# Altium PCB USB-C-SMD_C49261591.pcbdoc
Units mm, origin at the board's own origin, x right, y up, seen from the top; angles counter-clockwise.
Board outline 25.7 x 21.03 mm, 2 copper layers (Top Layer, Bottom Layer); 1 components, 0 nets, 30 pads, 0 vias.
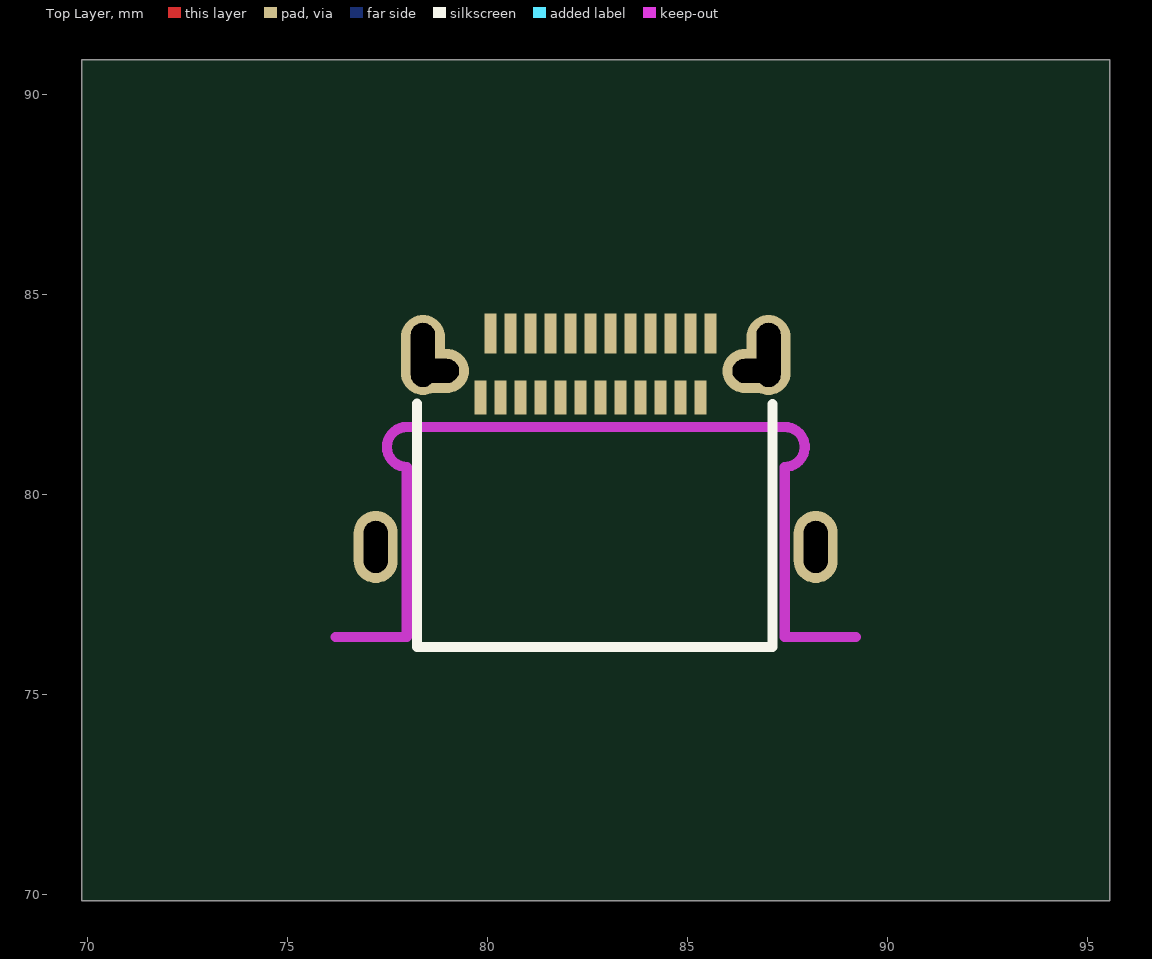
[diagram p0: Top Layer view]
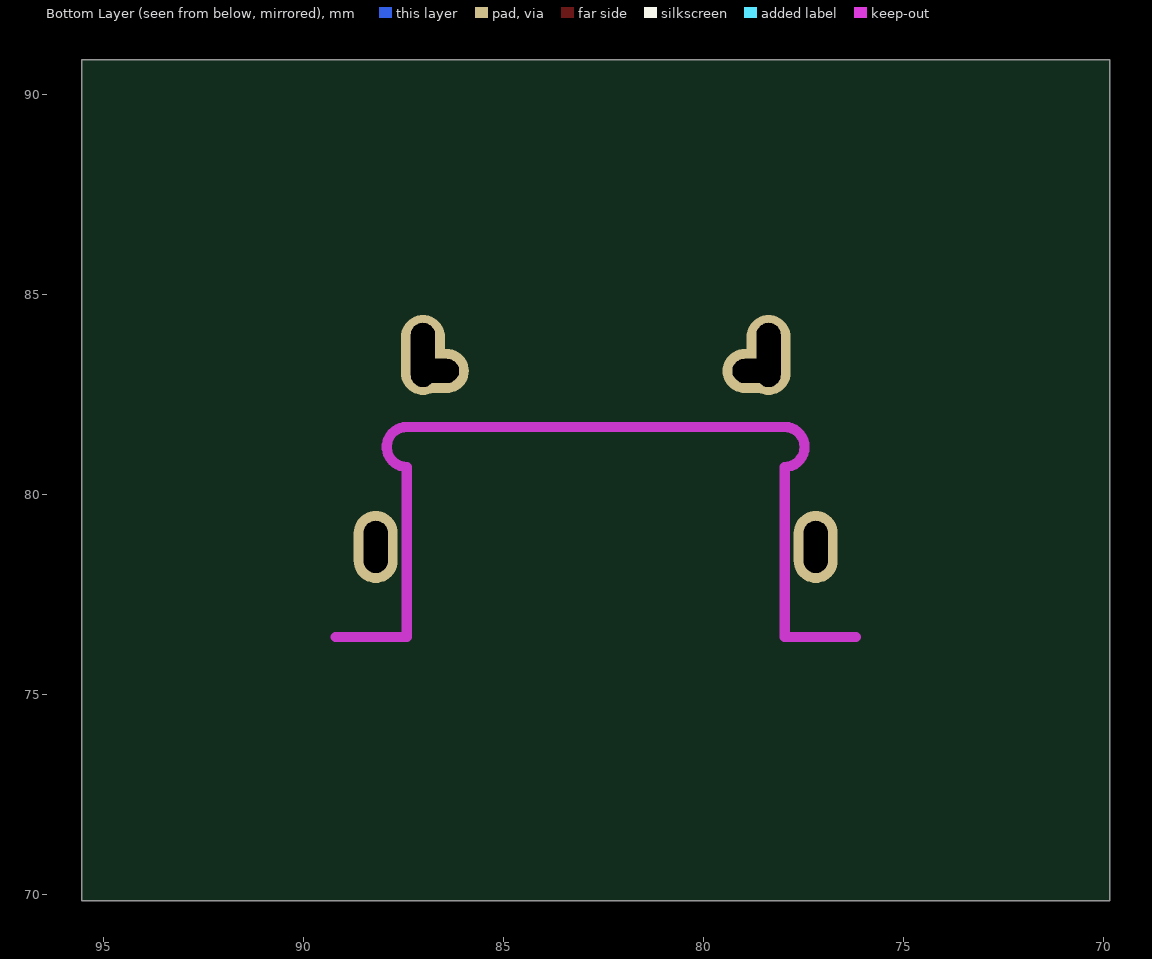
[diagram p1: Bottom Layer view, seen from below]

## Layer stack, top to bottom
Top Layer: signal copper (thickness not stored)
Dielectric: dielectric 0.32, FR-4, Dk 4.8
Bottom Layer: signal copper (thickness not stored)

## Board outline
95.55,69.85 69.85,69.85 69.85,90.88 95.55,90.88

## Design rules (kind name [scope] priority, off if disabled: settings)
BoardOutlineClearance safeClearance [All] p0: genericclearance=0.254 ignorepadtopadclearanceinfootprint=FALSE except(0: Arc-SplitContinuation Track-SplitContinuation SMDPad-SplitContinuation THPad-SplitContinuation Via-SplitContinuation Fill-SplitContinuation Poly-SplitContinuation Region-SplitContinuation Text-SplitContinuation; 0.152: Track-CutoutEdge SMDPad-CutoutEdge THPad-CutoutEdge Via-CutoutEdge Fill-CutoutEdge Region-CutoutEdge; 0.3: Track-OutlineEdge SMDPad-OutlineEdge THPad-OutlineEdge Via-OutlineEdge Fill-OutlineEdge Region-OutlineEdge Poly-OutlineEdge Text-OutlineEdge)
Clearance safeClearance [All] p1: gap=0.178 ignorepadtopadclearanceinfootprint=FALSE except(0.152: Track-Track Track-SMDPad SMDPad-SMDPad Track-THPad SMDPad-THPad THPad-THPad Track-Via SMDPad-Via THPad-Via Via-Via Track-Fill SMDPad-Fill THPad-Fill Via-Fill Fill-Fill Track-Region SMDPad-Region THPad-Region Via-Region Fill-Region Region-Region Track-Poly SMDPad-Poly THPad-Poly Via-Poly Fill-Poly Region-Poly Poly-Poly Track-Text SMDPad-Text THPad-Text Via-Text Fill-Text Region-Text Poly-Text Text-Text; 0.175: Track-Hole SMDPad-Hole THPad-Hole Via-Hole Fill-Hole Region-Hole Poly-Hole Text-Hole Sheet-Hole; 0.3: Track-Sheet SMDPad-Sheet THPad-Sheet Via-Sheet Fill-Sheet Region-Sheet Poly-Sheet Text-Sheet)
DiffPairsRouting differentialPair [All] p1: maxuncoupledlength=10 minlimit=6 maxlimit=6 mostfreqgap=6 toplayer_minwidth=5 toplayer_prefwidth=10 toplayer_maxwidth=100 bottomlayer_minwidth=5 bottomlayer_prefwidth=10 bottomlayer_maxwidth=100
PasteMaskExpansion pasteMaskExpansion [All] p1: expansion=0
PlaneConnect innerPlane [All] p1: planeconnectstyle=Relief reliefexpansion=0.508 reliefentries=4 reliefconductorwidth=0.254 reliefairgap=0.254
PolygonConnect copperRegion [All] p1: connectstyle=Relief reliefentries=4 reliefconductorwidth=10 polygonreliefangle="90 Angle" airgapwidth=10
RoutingVias viaSize [All] p1: viastyle="Through Hole" holewidth=12.0078 minholewidth=11.811 maxholewidth=236.2204 width=24.0158 minwidth=19.685 maxwidth=393.7008
SolderMaskExpansion solderMaskExpansion [All] p1: useseparateexpansions=TRUE expansion=2 expansionbottom=2
Width trackWidth [All] p1: maxlimit=100 minlimit=5 preferedwidth=10

## Components (designator, comment, footprint, x,y, rotation, side; value= is the part's Value field where it differs from the comment)
? "USB-C-SMD_C49261591" USB-C-SMD_C49261591 82.7,81.365 r0 top

## Footprints (in the part's own frame and the unit in brackets; to place one, negate y for a bottom-side part, rotate by r counter-clockwise, add the part's x,y. Pads: shape width x height; smd on the part's side, far side on the other; paste and mask are expansions set on the pad)
USB-C-SMD_C49261591 [mm]
  oval 1.1x1.8 hole 0.6 slot 1.3 at 90 deg copper offset 0,0: 3(5.5,-2.665)
  oval 1.1x1.8 hole 0.6 slot 1.3 at 90 deg: 4(-5.5,-2.665)
  oval 1.1x2 hole 0.6 slot 1.6 at 90 deg: 25(-4.32,2.135)
  oval 1.7x1.1 hole 0.6 slot 1.2 at 0 deg copper offset 0,0: 25(-4.02,1.735) 25(4.02,1.735)
  oval 1.1x2 hole 0.6 slot 1.6 at 90 deg copper offset 0,0: 25(4.32,2.135)
  rect 0.3x1 smd: A1(-2.625,2.665) A2(-2.125,2.665) A3(-1.625,2.665) A4(-1.125,2.665) A5(-0.625,2.665) A6(-0.125,2.665) A7(0.375,2.665) A8(0.875,2.665) A9(1.375,2.665) A10(1.875,2.665) A11(2.375,2.665) A12(2.875,2.665)
  rect 0.3x0.85 smd: B1(2.625,1.065) B2(2.125,1.065) B3(1.625,1.065) B4(1.125,1.065) B5(0.625,1.065) B6(0.125,1.065) B7(-0.375,1.065) B8(-0.875,1.065) B9(-1.375,1.065) B10(-1.875,1.065) B11(-2.375,1.065) B12(-2.875,1.065)
  Board Outline Layer lines w0.254: -4.725,-4.915 -4.725,-0.665 ; -4.725,-4.915 -6.5,-4.915 -4.725,-4.915 ; -4.725,-4.915 -4.725,-0.665 ; -4.725,-0.665 cw(c-4.721,-0.165) -4.725,0.335 ; -4.725,-0.665 cw(c-4.721,-0.165) -4.725,0.335 ; -4.725,0.335 4.725,0.335 ; -4.725,0.335 4.725,0.335 ; 4.725,-4.915 6.5,-4.915 4.725,-4.915 ; 4.725,-4.915 4.725,-0.665 ; 4.725,-4.915 4.725,-0.665 ; 4.725,-0.665 ccw(c4.725,-0.165) 4.725,0.335 ; 4.725,-0.665 ccw(c4.725,-0.165) 4.725,0.335
  silkscreen extent -4.47,-5.16 4.42,0.92

## Nets (pads, with @x,y where several pads share a name; then routed paths per layer and width w, separated by ;. In a path a pad name is that pad's centre, name@x,y a point inside that pad or via, vN(x,y) a via of type N, cw(c..) or ccw(c..) an arc to the next point about the centre after c; other vN are vias at no path point)
pads on no net: ?.3 ?.4 ?.25 ?.A1 ?.A2 ?.A3 ?.A4 ?.A5 ?.A6 ?.A7 ?.A8 ?.A9 ?.A10 ?.A11 ?.A12 ?.B1 ?.B2 ?.B3 ?.B4 ?.B5 ?.B6 ?.B7 ?.B8 ?.B9 ?.B10 ?.B11 ?.B12